# EAGLE board IN-12_panelA (EAGLE 9.6.2)
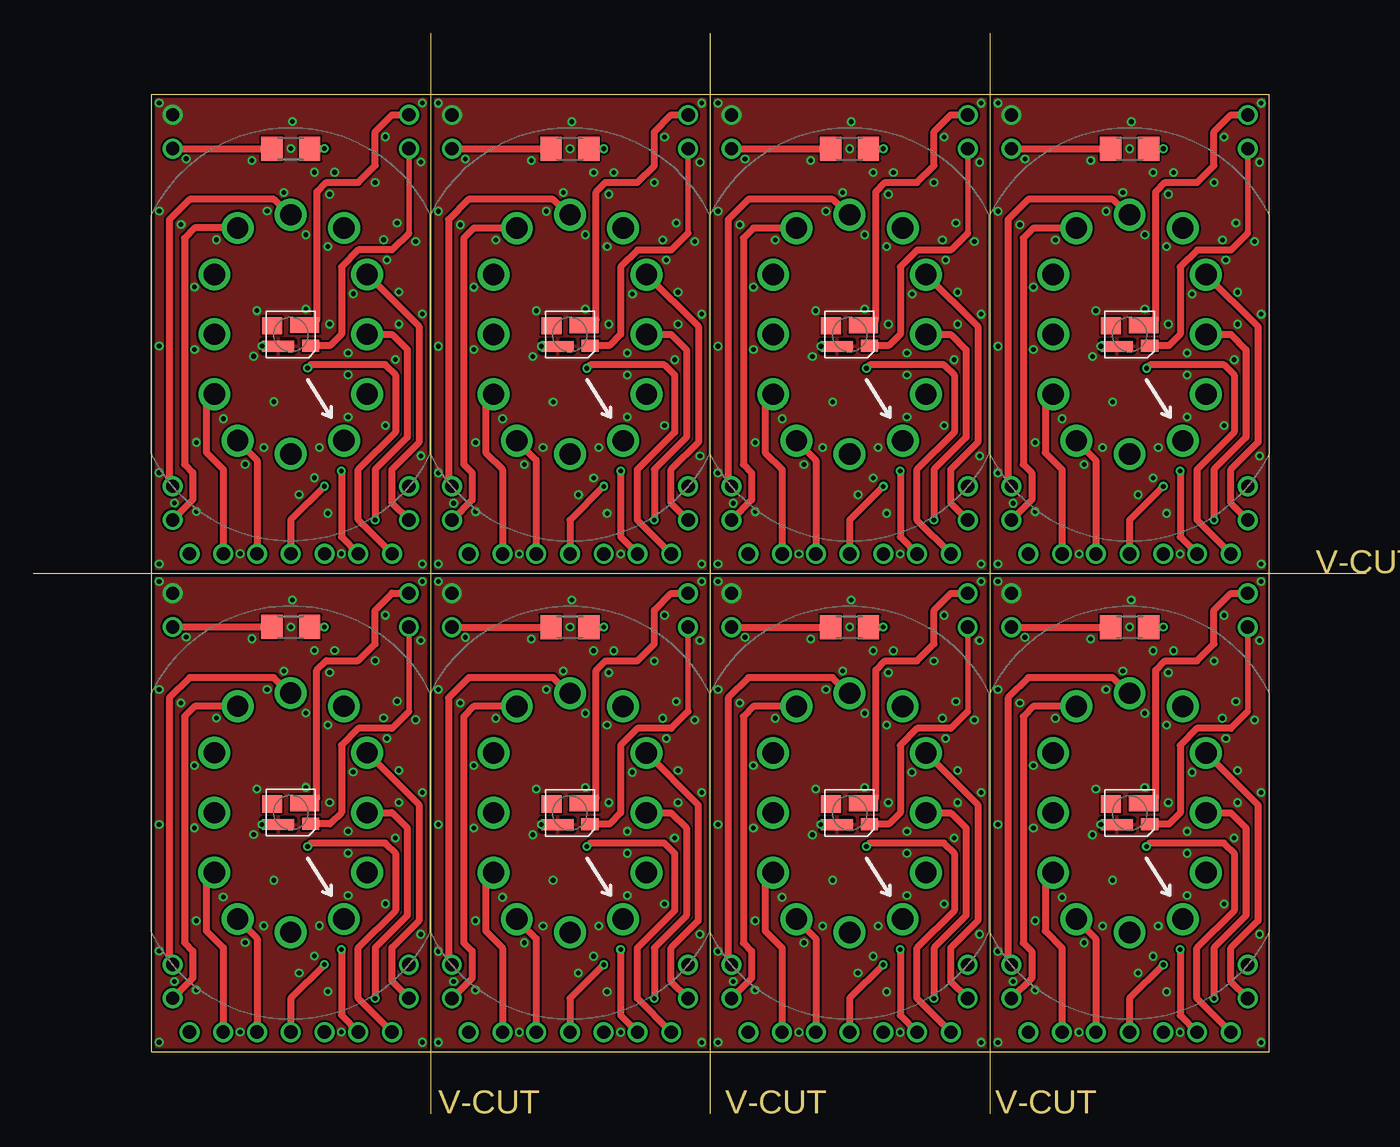
[diagram p0: board, top side]
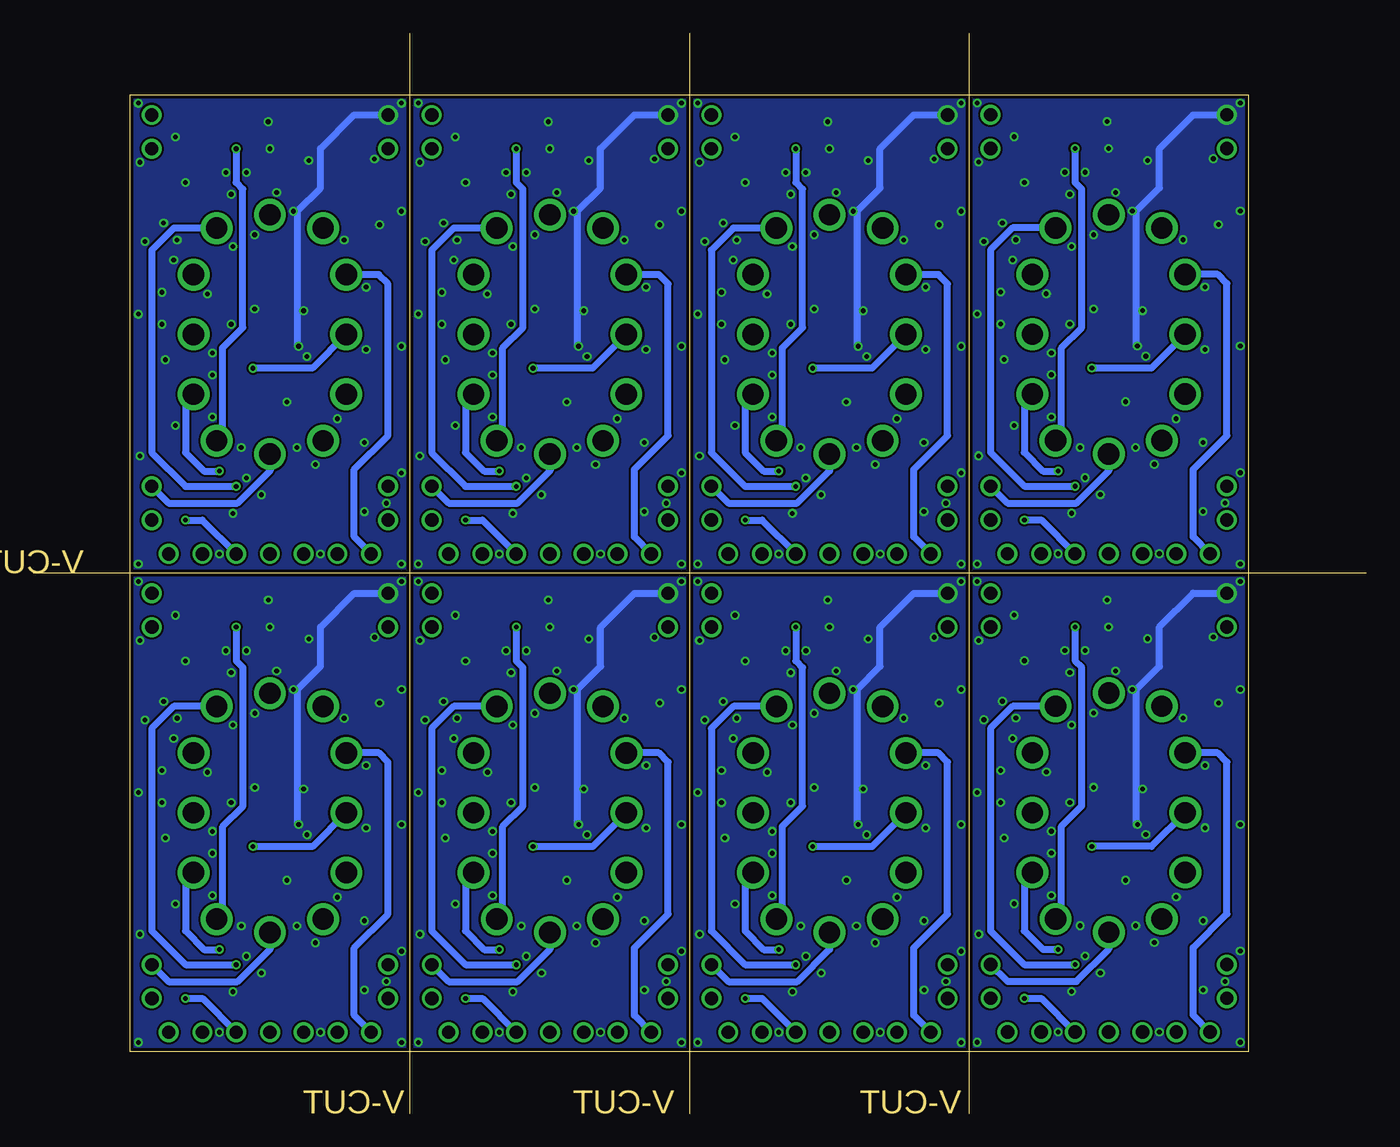
[diagram p1: board, bottom side, seen from below]

Size 100.33 x 81.28 mm. Coordinates in mm from the lower left corner, seen from the top.
Outline: 0,40.64 100.33,40.64
Outline: 29.89,81.28 29.89,0
Outline: 50.93,81.28 50.93,0
Outline: 71.99,81.28 71.99,0
Outline: 8.89,76.64 8.89,4.64 93.04,4.64 93.04,76.64 8.89,76.64
Copper layers (1*16): Top 0.035mm / dielectric 1.5mm / Bottom 0.035mm
Design rules "SeeedStudio_2layer_DRU_no_angle_20140221": minimum track width 6mil, minimum drill 12mil, track to track 6mil, track to pad 6mil, pad to pad 6mil, via to via 6mil, smd to smd 0mil, copper to edge 10mil, drill to drill 10mil, minimum pad ring 10mil, minimum via ring 6mil, stop-mask expansion 2mil, vias tented up to drill 100mil, thermal gap 10mil

## Footprints (pad centres in the part's own frame; a part is rotated, then mirrored left to right if it is on the bottom)
IN-12_PS = drill 1.6: 1 4,-8; 2 5.75,-4.5; 3 5.75,0; 4 5.75,4.5; 5 4,8; 6 0,9; 7 -4,8; 8 -5.75,4.5; 9 -5.75,0; 10 -5.75,-4.5; 11 -4,-8; 12 0,-9
SK68XXMINI = smd 1.3 x 0.9: P1 1.5,-0.85 | smd 2.2 x 1.2: P2 1.05,0.7 | smd 1.5 x 1.3: P3 -1.4,0.65 | smd 2.4 x 0.8: P4 -0.95,-0.9
R1206 = smd 1.6 x 1.803: 1 -1.422,0; 2 1.422,0

## Placement (x,y rotation side)
L1  IN-12B_PS  [IN-12_PS]  19.38,58.63 0 top
L2  IN-12B_PS  [IN-12_PS]  19.38,22.64 0 top
L3  IN-12B_PS  [IN-12_PS]  40.4,58.62 0 top
L4  IN-12B_PS  [IN-12_PS]  40.4,22.63 0 top
L5  IN-12B_PS  [IN-12_PS]  61.44,58.62 0 top
L6  IN-12B_PS  [IN-12_PS]  61.44,22.63 0 top
L7  IN-12B_PS  [IN-12_PS]  82.52,58.62 0 top
L8  IN-12B_PS  [IN-12_PS]  82.51,22.63 0 top
LED  SK6812MINI  [SK68XXMINI]  19.38,58.63 0 top
LED1  SK6812MINI  [SK68XXMINI]  19.38,22.64 0 top
LED2  SK6812MINI  [SK68XXMINI]  40.4,58.62 0 top
LED3  SK6812MINI  [SK68XXMINI]  40.4,22.63 0 top
LED4  SK6812MINI  [SK68XXMINI]  61.44,58.62 0 top
LED5  SK6812MINI  [SK68XXMINI]  61.44,22.63 0 top
LED6  SK6812MINI  [SK68XXMINI]  82.52,58.62 0 top
LED7  SK6812MINI  [SK68XXMINI]  82.51,22.63 0 top
R1  15k  [R1206]  19.38,36.61 180 top
R2  15k  [R1206]  19.38,72.6 180 top
R3  15k  [R1206]  40.4,72.59 180 top
R4  15k  [R1206]  40.4,36.6 180 top
R5  15k  [R1206]  61.44,72.59 180 top
R6  15k  [R1206]  61.44,36.6 180 top
R7  15k  [R1206]  82.52,72.59 180 top
R8  15k  [R1206]  82.51,36.6 180 top

## Library data of the parts
L1-L8 = nixie-tube
LED LED1-LED7 = leds
R1-R8 = rcl; SPICEPREFIX: R

## Nets
GND: LED.P4
GND1: LED1.P4
GND2: LED2.P4
GND3: LED3.P4
GND4: LED4.P4
GND5: LED5.P4
GND6: LED6.P4
GND7: LED7.P4
K0: L1.2
K1: L1.11
K2: L1.10
K3: L1.9
K4: L1.8
K5: L1.7
K6: L1.6
K7: L1.5
K8: L1.4
K9: L1.3
K10: L2.2
K11: L2.3
K12: L2.4
K13: L2.5
K14: L2.6
K15: L2.7
K16: L2.8
K17: L2.9
K18: L2.10
K19: L2.11
K20: L3.2
K21: L3.3
K22: L3.4
K23: L3.5
K24: L3.6
K25: L3.7
K26: L3.8
K27: L3.9
K28: L3.10
K29: L3.11
K30: L4.2
K31: L4.3
K32: L4.4
K33: L4.5
K34: L4.6
K35: L4.7
K36: L4.8
K37: L4.9
K38: L4.10
K39: L4.11
K40: L5.2
K41: L5.3
K42: L5.4
K43: L5.5
K44: L5.6
K45: L5.7
K46: L5.8
K47: L5.9
K48: L5.10
K49: L5.11
K50: L6.2
K51: L6.3
K52: L6.4
K53: L6.5
K54: L6.6
K55: L6.7
K56: L6.8
K57: L6.9
K58: L6.10
K59: L6.11
K60: L7.2
K61: L7.3
K62: L7.4
K63: L7.5
K64: L7.6
K65: L7.7
K66: L7.8
K67: L7.9
K68: L7.10
K69: L7.11
K70: L8.2
K71: L8.3
K72: L8.4
K73: L8.5
K74: L8.6
K75: L8.7
K76: L8.8
K77: L8.9
K78: L8.10
K79: L8.11
KD: L1.12
KD1: L2.12
KD2: L3.12
KD3: L4.12
KD4: L5.12
KD5: L6.12
KD6: L7.12
KD7: L8.12
LED: LED.P1
LED1: LED1.P1
LED2: LED2.P1
LED3: LED3.P1
LED4: LED4.P1
LED5: LED5.P1
LED6: LED6.P1
LED7: LED7.P1
N$1: L2.1 R1.1
N$2: L3.1 R3.1
N$3: L4.1 R4.1
N$4: L5.1 R5.1
N$5: L6.1 R6.1
N$6: L7.1 R7.1
N$7: L8.1 R8.1
N$11: L1.1 R2.1
VCC: LED.P2
VCC1: LED1.P2
VCC2: LED2.P2
VCC3: LED3.P2
VCC4: LED4.P2
VCC5: LED5.P2
VCC6: LED6.P2
VCC7: LED7.P2
VPP: R2.2
VPP1: R1.2
VPP2: R3.2
VPP3: R4.2
VPP4: R5.2
VPP5: R6.2
VPP6: R7.2
VPP7: R8.2

## Tracks (layer width: path | path; a pad name or v marks a point on that pad's centre or on a via)
GND  (via drill 0.35, 1)
  Top 0.508: LED.P4 17.24,57.73 v17.23,57.74
  Bottom 0.508: v17.23,57.74 17.29,57.8 17.29,67.93 15.57,69.64 15.57,72.6 13.04,75.14 v10.5,75.14
  other vias: 16.84,60.41 16.59,56.98 20.53,60.53 20.53,66.12 29.29,76.03 19.51,74.63 9.48,76.03 11.51,71.84 16.46,71.71 19.38,72.6 22.69,70.82 21.16,70.82 22.31,69.17 25.73,70.06 26.5,73.49 29.16,71.58 28.78,65.61 27.39,67.01 26.37,65.74 26.62,64.22 22.18,65.23 27.51,61.8 29.29,60.15 27.51,59.39 24.08,61.68 22.31,59.39 18.88,69.3 17.61,67.9 13.8,65.74 11.13,66.88 9.48,67.9 9.48,57.74 12.15,62.19 12.15,57.49 14.3,52.28 18.12,53.55 23.7,57.23 23.7,55.58 27.26,56.72 23.7,52.41 26.5,51.77 21.54,50.12 17.35,50.12 12.27,50.5 15.96,48.85 9.48,48.22 10.62,45.93 12.27,45.29 9.48,41.36 15.57,42.12 23.2,42.12 22.18,45.17 21.16,47.83 20.02,46.56 29.29,41.36 29.16,49.48
  pour Top: 8.97,76.54 29.8,76.54 29.8,40.72 8.97,40.72
  pour Bottom: 8.97,76.54 29.93,76.54 29.93,40.72 8.97,40.72
GND1  (via drill 0.35, 1)
  Top 0.508: LED1.P4 17.23,21.74 v17.22,21.75
  Bottom 0.508: v17.22,21.75 17.29,21.82 17.29,31.94 15.57,33.65 15.57,36.61 13.03,39.15 v10.49,39.15
  other vias: 16.84,24.42 16.59,20.99 20.53,24.54 20.53,30.13 29.29,40.04 19.51,38.64 9.48,40.04 11.51,35.85 16.46,35.72 19.38,36.61 22.69,34.83 21.16,34.83 22.3,33.18 25.73,34.07 26.5,37.5 29.16,35.59 28.78,29.62 27.38,31.02 26.37,29.75 26.62,28.23 22.18,29.24 27.51,25.81 29.29,24.16 27.51,23.4 24.08,25.69 22.3,23.4 18.88,33.31 17.61,31.91 13.8,29.75 11.13,30.89 9.48,31.91 9.48,21.75 12.14,26.2 12.14,21.5 14.3,16.29 18.11,17.56 23.7,21.24 23.7,19.59 27.26,20.73 23.7,16.42 26.5,15.78 21.54,14.13 17.35,14.13 12.27,14.51 15.95,12.86 9.48,12.23 10.62,9.94 12.27,9.3 9.48,5.37 15.57,6.13 23.19,6.13 22.18,9.18 21.16,11.84 20.02,10.57 29.29,5.37 29.16,13.5
  pour Top: 8.97,40.55 29.8,40.55 29.8,4.73 8.97,4.73
  pour Bottom: 8.97,40.55 29.92,40.55 29.92,4.73 8.97,4.73
GND2  (via drill 0.35, 1)
  Top 0.508: LED2.P4 38.25,57.72 v38.24,57.73
  Bottom 0.508: v38.24,57.73 38.31,57.8 38.31,67.92 36.59,69.63 36.59,72.59 34.05,75.13 v31.51,75.13
  other vias: 37.86,60.4 37.61,56.97 41.54,60.53 41.54,66.11 50.31,76.02 40.53,74.62 30.49,76.02 32.53,71.83 37.48,71.7 40.4,72.59 43.7,70.81 42.18,70.81 43.32,69.16 46.75,70.05 47.51,73.48 50.18,71.57 49.8,65.61 48.4,67 47.39,65.73 47.64,64.21 43.19,65.22 48.53,61.8 50.31,60.14 48.53,59.38 45.1,61.67 43.32,59.38 39.89,69.29 38.62,67.89 34.81,65.73 32.15,66.88 30.49,67.89 30.49,57.73 33.16,62.18 33.16,57.48 35.32,52.27 39.13,53.54 44.72,57.22 44.72,55.57 48.27,56.72 44.72,52.4 47.51,51.76 42.56,50.11 38.37,50.11 33.29,50.49 36.97,48.84 30.49,48.21 31.64,45.92 33.29,45.28 30.49,41.35 36.59,42.11 44.21,42.11 43.19,45.16 42.18,47.83 41.04,46.55 50.31,41.35 50.18,49.48
  pour Top: 29.99,76.53 50.81,76.53 50.81,40.71 29.99,40.71
  pour Bottom: 29.99,76.53 50.94,76.53 50.94,40.71 29.99,40.71
GND3  (via drill 0.35, 1)
  Top 0.508: LED3.P4 v38.25,21.73 v38.24,21.74
  Bottom 0.508: v38.24,21.74 38.3,21.81 38.3,31.93 36.59,33.64 36.59,36.6 34.05,39.14 v31.51,39.14
  other vias: 37.86,24.41 37.6,20.98 41.54,24.54 41.54,30.12 50.3,40.03 40.53,38.63 30.49,40.03 32.52,35.84 37.48,35.71 40.4,36.6 43.7,34.82 42.18,34.82 43.32,33.17 46.75,34.06 47.51,37.49 50.18,35.58 49.8,29.62 48.4,31.01 47.38,29.74 47.64,28.22 43.19,29.23 48.53,25.8 50.3,24.15 48.53,23.39 45.1,25.68 43.32,23.39 39.89,33.3 38.62,31.9 34.81,29.74 32.14,30.88 30.49,31.9 30.49,21.74 33.16,26.19 33.16,21.49 35.32,16.28 39.13,17.55 44.72,21.23 44.72,19.58 48.27,20.73 44.72,16.41 47.51,15.77 42.56,14.12 38.37,14.12 33.29,14.5 36.97,12.85 30.49,12.22 31.64,9.93 33.29,9.3 30.49,5.36 36.59,6.12 44.21,6.12 43.19,9.17 42.18,11.84 41.03,10.57 50.3,5.36 50.18,13.49
  pour Top: 29.98,40.54 50.81,40.54 50.81,4.72 29.98,4.72
  pour Bottom: 29.98,40.54 50.94,40.54 50.94,4.72 29.98,4.72
GND4  (via drill 0.35, 1)
  Top 0.508: LED4.P4 59.29,57.72 v59.28,57.73
  Bottom 0.508: v59.28,57.73 59.35,57.8 59.35,67.92 57.63,69.63 57.63,72.59 55.09,75.13 v52.55,75.13
  other vias: 58.9,60.4 58.65,56.97 62.59,60.53 62.59,66.11 71.35,76.02 61.57,74.62 51.54,76.02 53.57,71.83 58.52,71.7 61.44,72.59 64.74,70.81 63.22,70.81 64.36,69.16 67.79,70.05 68.55,73.48 71.22,71.57 70.84,65.61 69.44,67 68.43,65.73 68.68,64.21 64.24,65.22 69.57,61.8 71.35,60.14 69.57,59.38 66.14,61.67 64.36,59.38 60.93,69.29 59.66,67.89 55.85,65.73 53.19,66.88 51.54,67.89 51.54,57.73 54.2,62.18 54.2,57.48 56.36,52.27 60.17,53.54 65.76,57.22 65.76,55.57 69.32,56.72 65.76,52.4 68.55,51.76 63.6,50.11 59.41,50.11 54.33,50.49 58.01,48.84 51.54,48.21 52.68,45.92 54.33,45.28 51.54,41.35 57.63,42.11 65.25,42.11 64.24,45.16 63.22,47.83 62.08,46.55 71.35,41.35 71.22,49.48
  pour Top: 51.03,76.53 71.86,76.53 71.86,40.71 51.03,40.71
  pour Bottom: 51.03,76.53 71.98,76.53 71.98,40.71 51.03,40.71
GND5  (via drill 0.35, 1)
  Top 0.508: LED5.P4 59.29,21.73 v59.28,21.74
  Bottom 0.508: v59.28,21.74 59.35,21.81 59.35,31.93 57.63,33.64 57.63,36.6 55.09,39.14 v52.55,39.14
  other vias: 58.9,24.41 58.65,20.98 62.58,24.54 62.58,30.12 71.35,40.03 61.57,38.63 51.53,40.03 53.57,35.84 58.52,35.71 61.44,36.6 64.74,34.82 63.22,34.82 64.36,33.17 67.79,34.06 68.55,37.49 71.22,35.58 70.84,29.62 69.44,31.01 68.43,29.74 68.68,28.22 64.23,29.23 69.57,25.8 71.35,24.15 69.57,23.39 66.14,25.68 64.36,23.39 60.93,33.3 59.66,31.9 55.85,29.74 53.19,30.88 51.53,31.9 51.53,21.74 54.2,26.19 54.2,21.49 56.36,16.28 60.17,17.55 65.76,21.23 65.76,19.58 69.31,20.73 65.76,16.41 68.55,15.77 63.6,14.12 59.41,14.12 54.33,14.5 58.01,12.85 51.53,12.22 52.68,9.93 54.33,9.3 51.53,5.36 57.63,6.12 65.25,6.12 64.23,9.17 63.22,11.84 62.08,10.57 71.35,5.36 71.22,13.49
  pour Top: 51.03,40.54 71.85,40.54 71.85,4.72 51.03,4.72
  pour Bottom: 51.03,40.54 71.98,40.54 71.98,4.72 51.03,4.72
GND6  (via drill 0.35, 1)
  Top 0.508: LED6.P4 v80.37,57.72 v80.36,57.73
  Bottom 0.508: v80.36,57.73 80.42,57.8 80.42,67.92 78.71,69.63 78.71,72.59 76.17,75.13 v73.63,75.13
  other vias: 79.98,60.4 79.72,56.97 83.66,60.53 83.66,66.11 92.42,76.02 82.64,74.62 72.61,76.02 74.64,71.83 79.59,71.7 82.52,72.59 85.82,70.81 84.29,70.81 85.44,69.16 88.87,70.05 89.63,73.48 92.3,71.57 91.91,65.61 90.52,67 89.5,65.73 89.75,64.21 85.31,65.22 90.64,61.8 92.42,60.14 90.64,59.38 87.22,61.67 85.44,59.38 82.01,69.29 80.74,67.89 76.93,65.73 74.26,66.88 72.61,67.89 72.61,57.73 75.28,62.18 75.28,57.48 77.44,52.27 81.25,53.54 86.83,57.22 86.83,55.57 90.39,56.72 86.83,52.4 89.63,51.76 84.67,50.11 80.48,50.11 75.4,50.49 79.09,48.84 72.61,48.21 73.75,45.92 75.4,45.28 72.61,41.35 78.71,42.11 86.33,42.11 85.31,45.16 84.29,47.83 83.15,46.55 92.42,41.35 92.3,49.48
  pour Top: 72.1,76.53 92.93,76.53 92.93,40.71 72.1,40.71
  pour Bottom: 72.1,76.53 93.06,76.53 93.06,40.71 72.1,40.71
GND7  (via drill 0.35, 1)
  Top 0.508: LED7.P4 v80.37,21.73 v80.36,21.74
  Bottom 0.508: v80.36,21.74 80.42,21.81 80.42,31.93 78.7,33.64 78.7,36.6 76.16,39.14 v73.62,39.14
  other vias: 79.97,24.41 79.72,20.98 83.66,24.54 83.66,30.12 92.42,40.03 82.64,38.63 72.61,40.03 74.64,35.84 79.59,35.71 82.51,36.6 85.82,34.82 84.29,34.82 85.44,33.17 88.86,34.06 89.63,37.49 92.29,35.58 91.91,29.62 90.52,31.01 89.5,29.74 89.75,28.22 85.31,29.23 90.64,25.8 92.42,24.15 90.64,23.39 87.21,25.68 85.44,23.39 82.01,33.3 80.74,31.9 76.93,29.74 74.26,30.88 72.61,31.9 72.61,21.74 75.28,26.19 75.28,21.49 77.43,16.28 81.24,17.55 86.83,21.23 86.83,19.58 90.39,20.73 86.83,16.41 89.63,15.77 84.67,14.12 80.48,14.12 75.4,14.5 79.08,12.85 72.61,12.22 73.75,9.93 75.4,9.3 72.61,5.36 78.7,6.12 86.32,6.12 85.31,9.17 84.29,11.84 83.15,10.57 92.42,5.36 92.29,13.49
  pour Top: 72.1,40.54 92.93,40.54 92.93,4.72 72.1,4.72
  pour Bottom: 72.1,40.54 93.06,40.54 93.06,4.72 72.1,4.72
K0  (via drill 0.35, 1)
  Top 0.508: v23.2,48.34 23.2,43.39 v24.46,42.12
  Bottom 0.508: L1.2 25.73,53.53 25.73,49.74 24.34,48.34 v23.2,48.34
K1  (via drill 1)
  Top 0.508: L1.11 16.84,49.17 v16.84,42.12
K2  (via drill 1)
  Top 0.508: L1.10 13.05,53.55 13.04,53.55 13.04,49.74 14.3,48.47 v14.3,42.12
K3  (via drill 0.35, 1)
  Top 0.508: v20.66,56.09 20.91,56.34 26.5,56.34 27.26,55.58 27.26,51.26 24.46,48.47 24.46,44.66 v27,42.12
  Bottom 0.508: L1.9 16.18,56.09 v20.66,56.09
K4  (via drill 1)
  Bottom 0.508: v11.77,42.12 13.04,43.39 13.04,48.47 10.5,51.01 10.5,62.44 11.19,63.13 L1.8
K5  (via drill 1)
  Top 0.508: L1.7 12.14,66.63 11.38,65.87 11.38,48.85 12.02,48.22 12.02,46.18 v10.5,44.66
K6  (via drill 1)
  Top 0.508: L1.6 19.27,67.63 18.12,68.79 11.77,68.79 10.24,67.27 10.24,47.45 v10.5,47.2
K7  (via drill 0.35, 1)
  Top 0.508: v21.93,47.2 19.38,44.66 v19.38,42.12
  Bottom 0.508: L1.5 26.62,66.63 28.28,64.98 28.28,49.74 25.73,47.2 v21.93,47.2
K8  (via drill 1)
  Top 0.508: L1.4 29.04,59.23 29.04,50.5 27,48.47 27,45.93 v28.28,44.66
K9  (via drill 0.35, 1)
  Top 0.508: L1.3 27,58.63 28.15,57.49 28.15,50.88 25.73,48.47 v25.73,44.66
  Bottom 0.508: v25.73,44.66 24.46,44.66 v21.93,42.12
K10  (via drill 0.35, 1)
  Top 0.508: v23.19,12.35 23.19,7.4 v24.46,6.13
  Bottom 0.508: L2.2 25.73,17.54 25.73,13.75 24.34,12.35 v23.19,12.35
K11  (via drill 0.35, 1)
  Top 0.508: L2.3 27,22.64 28.15,21.5 28.15,14.89 25.73,12.48 v25.73,8.67
  Bottom 0.508: v25.73,8.67 24.46,8.67 v21.92,6.13
K12  (via drill 1)
  Top 0.508: L2.4 29.04,23.24 29.04,14.51 27,12.48 27,9.94 v28.27,8.67
K13  (via drill 0.35, 1)
  Top 0.508: v21.92,11.21 19.38,8.67 v19.38,6.13
  Bottom 0.508: L2.5 26.62,30.64 28.27,28.99 28.27,13.75 25.73,11.21 v21.92,11.21
K14  (via drill 1)
  Top 0.508: L2.6 19.27,31.64 18.11,32.8 11.76,32.8 10.24,31.27 10.24,11.46 v10.49,11.21
K15  (via drill 1)
  Top 0.508: L2.7 12.14,30.64 11.38,29.88 11.38,12.86 12.02,12.23 12.02,10.19 v10.49,8.67
K16  (via drill 1)
  Bottom 0.508: v11.76,6.13 13.03,7.4 13.03,12.48 10.49,15.02 10.49,26.45 11.18,27.14 L2.8
K17  (via drill 0.35, 1)
  Top 0.508: v20.65,20.1 20.91,20.35 26.5,20.35 27.26,19.59 27.26,15.27 24.46,12.48 24.46,8.67 v27,6.13
  Bottom 0.508: L2.9 16.17,20.1 v20.65,20.1
K18  (via drill 1)
  Top 0.508: L2.10 13.05,17.56 13.03,17.56 13.03,13.75 14.3,12.48 v14.3,6.13
K19  (via drill 1)
  Top 0.508: L2.11 16.84,13.18 v16.84,6.13
K20  (via drill 0.35, 1)
  Top 0.508: v44.21,48.33 44.21,43.38 v45.48,42.11
  Bottom 0.508: L3.2 46.75,53.52 46.75,49.73 45.35,48.33 v44.21,48.33
K21  (via drill 0.35, 1)
  Top 0.508: L3.3 48.02,58.62 49.16,57.48 49.16,50.87 46.75,48.46 v46.75,44.65
  Bottom 0.508: v46.75,44.65 45.48,44.65 v42.94,42.11
K22  (via drill 1)
  Top 0.508: L3.4 50.05,59.22 50.05,50.49 48.02,48.46 48.02,45.92 v49.29,44.65
K23  (via drill 0.35, 1)
  Top 0.508: v42.94,47.19 40.4,44.65 v40.4,42.11
  Bottom 0.508: L3.5 47.64,66.62 49.29,64.97 49.29,49.73 46.75,47.19 v42.94,47.19
K24  (via drill 1)
  Top 0.508: L3.6 40.29,67.62 39.13,68.78 32.78,68.78 31.26,67.26 31.26,47.44 v31.51,47.19
K25  (via drill 1)
  Top 0.508: L3.7 33.16,66.62 32.4,65.86 32.4,48.84 33.03,48.21 33.03,46.17 v31.51,44.65
K26  (via drill 1)
  Bottom 0.508: v32.78,42.11 34.05,43.38 34.05,48.46 31.51,51 31.51,62.43 32.2,63.12 L3.8
K27  (via drill 0.35, 1)
  Top 0.508: v41.67,56.08 41.92,56.33 47.51,56.33 48.27,55.57 48.27,51.25 45.48,48.46 45.48,44.65 v48.02,42.11
  Bottom 0.508: L3.9 37.19,56.08 v41.67,56.08
K28  (via drill 1)
  Top 0.508: L3.10 34.07,53.54 34.05,53.54 34.05,49.73 35.32,48.46 v35.32,42.11
K29  (via drill 1)
  Top 0.508: L3.11 37.86,49.16 v37.86,42.11
K30  (via drill 0.35, 1)
  Top 0.508: v44.21,12.34 44.21,7.39 v45.48,6.12
  Bottom 0.508: L4.2 46.75,17.53 46.75,13.74 45.35,12.34 v44.21,12.34
K31  (via drill 0.35, 1)
  Top 0.508: L4.3 48.02,22.63 49.16,21.49 49.16,14.88 46.75,12.47 v46.75,8.66
  Bottom 0.508: v46.75,8.66 45.48,8.66 v42.94,6.12
K32  (via drill 1)
  Top 0.508: L4.4 50.05,23.23 50.05,14.5 48.02,12.47 48.02,9.93 v49.29,8.66
K33  (via drill 0.35, 1)
  Top 0.508: v42.94,11.2 40.4,8.66 v40.4,6.12
  Bottom 0.508: L4.5 47.64,30.63 49.29,28.98 49.29,13.74 46.75,11.2 v42.94,11.2
K34  (via drill 1)
  Top 0.508: L4.6 40.29,31.63 39.13,32.79 32.78,32.79 31.25,31.27 31.25,11.45 v31.51,11.2
K35  (via drill 1)
  Top 0.508: L4.7 33.16,30.63 32.4,29.87 32.4,12.85 33.03,12.22 33.03,10.18 v31.51,8.66
K36  (via drill 1)
  Bottom 0.508: v32.78,6.12 34.05,7.39 34.05,12.47 31.51,15.01 31.51,26.44 32.2,27.13 L4.8
K37  (via drill 0.35, 1)
  Top 0.508: v41.67,20.09 41.92,20.34 47.51,20.34 48.27,19.58 48.27,15.26 45.48,12.47 45.48,8.66 v48.02,6.12
  Bottom 0.508: L4.9 37.19,20.09 v41.67,20.09
K38  (via drill 1)
  Top 0.508: L4.10 34.07,17.55 34.05,17.55 34.05,13.74 35.32,12.47 v35.32,6.12
K39  (via drill 1)
  Top 0.508: L4.11 37.86,13.17 v37.86,6.12
K40  (via drill 0.35, 1)
  Top 0.508: v65.25,48.33 65.25,43.38 v66.52,42.11
  Bottom 0.508: L5.2 67.79,53.52 67.79,49.73 66.4,48.33 v65.25,48.33
K41  (via drill 0.35, 1)
  Top 0.508: L5.3 69.06,58.62 70.21,57.48 70.21,50.87 67.79,48.46 v67.79,44.65
  Bottom 0.508: v67.79,44.65 66.52,44.65 v63.98,42.11
K42  (via drill 1)
  Top 0.508: L5.4 71.09,59.22 71.09,50.49 69.06,48.46 69.06,45.92 v70.33,44.65
K43  (via drill 0.35, 1)
  Top 0.508: v63.98,47.19 61.44,44.65 v61.44,42.11
  Bottom 0.508: L5.5 68.68,66.62 70.33,64.97 70.33,49.73 67.79,47.19 v63.98,47.19
K44  (via drill 1)
  Top 0.508: L5.6 61.33,67.62 60.17,68.78 53.82,68.78 52.3,67.26 52.3,47.44 v52.55,47.19
K45  (via drill 1)
  Top 0.508: L5.7 54.2,66.62 53.44,65.86 53.44,48.84 54.08,48.21 54.08,46.17 v52.55,44.65
K46  (via drill 1)
  Bottom 0.508: v53.82,42.11 55.09,43.38 55.09,48.46 52.55,51 52.55,62.43 53.24,63.12 L5.8
K47  (via drill 0.35, 1)
  Top 0.508: v62.71,56.08 62.97,56.33 68.55,56.33 69.32,55.57 69.32,51.25 66.52,48.46 66.52,44.65 v69.06,42.11
  Bottom 0.508: L5.9 58.23,56.08 v62.71,56.08
K48  (via drill 1)
  Top 0.508: L5.10 55.11,53.54 55.09,53.54 55.09,49.73 56.36,48.46 v56.36,42.11
K49  (via drill 1)
  Top 0.508: L5.11 58.9,49.16 v58.9,42.11
K50  (via drill 0.35, 1)
  Top 0.508: v65.25,12.34 65.25,7.39 v66.52,6.12
  Bottom 0.508: L6.2 67.79,17.53 67.79,13.74 66.39,12.34 v65.25,12.34
K51  (via drill 0.35, 1)
  Top 0.508: L6.3 69.06,22.63 70.2,21.49 70.2,14.88 67.79,12.47 v67.79,8.66
  Bottom 0.508: v67.79,8.66 66.52,8.66 v63.98,6.12
K52  (via drill 1)
  Top 0.508: L6.4 71.09,23.23 71.09,14.5 69.06,12.47 69.06,9.93 v70.33,8.66
K53  (via drill 0.35, 1)
  Top 0.508: v63.98,11.2 61.44,8.66 v61.44,6.12
  Bottom 0.508: L6.5 68.68,30.63 70.33,28.98 70.33,13.74 67.79,11.2 v63.98,11.2
K54  (via drill 1)
  Top 0.508: L6.6 61.33,31.63 60.17,32.79 53.82,32.79 52.3,31.27 52.3,11.45 v52.55,11.2
K55  (via drill 1)
  Top 0.508: L6.7 54.2,30.63 53.44,29.87 53.44,12.85 54.07,12.22 54.07,10.18 v52.55,8.66
K56  (via drill 1)
  Bottom 0.508: v53.82,6.12 55.09,7.39 55.09,12.47 52.55,15.01 52.55,26.44 53.24,27.13 L6.8
K57  (via drill 0.35, 1)
  Top 0.508: v62.71,20.09 62.97,20.34 68.55,20.34 69.31,19.58 69.31,15.26 66.52,12.47 66.52,8.66 v69.06,6.12
  Bottom 0.508: L6.9 58.23,20.09 v62.71,20.09
K58  (via drill 1)
  Top 0.508: L6.10 55.11,17.55 55.09,17.55 55.09,13.74 56.36,12.47 v56.36,6.12
K59  (via drill 1)
  Top 0.508: L6.11 58.9,13.17 v58.9,6.12
K60  (via drill 0.35, 1)
  Top 0.508: v86.33,48.33 86.33,43.38 v87.6,42.11
  Bottom 0.508: L7.2 88.87,53.52 88.87,49.73 87.47,48.33 v86.33,48.33
K61  (via drill 0.35, 1)
  Top 0.508: L7.3 90.14,58.62 91.28,57.48 91.28,50.87 88.87,48.46 v88.87,44.65
  Bottom 0.508: v88.87,44.65 87.6,44.65 v85.06,42.11
K62  (via drill 1)
  Top 0.508: L7.4 92.17,59.22 92.17,50.49 90.14,48.46 90.14,45.92 v91.41,44.65
K63  (via drill 0.35, 1)
  Top 0.508: v85.06,47.19 82.52,44.65 v82.52,42.11
  Bottom 0.508: L7.5 89.76,66.62 91.41,64.97 91.41,49.73 88.87,47.19 v85.06,47.19
K64  (via drill 1)
  Top 0.508: L7.6 82.41,67.62 81.25,68.78 74.9,68.78 73.37,67.26 73.37,47.44 v73.63,47.19
K65  (via drill 1)
  Top 0.508: L7.7 75.28,66.62 74.52,65.86 74.52,48.84 75.15,48.21 75.15,46.17 v73.63,44.65
K66  (via drill 1)
  Bottom 0.508: v74.9,42.11 76.17,43.38 76.17,48.46 73.63,51 73.63,62.43 74.32,63.12 L7.8
K67  (via drill 0.35, 1)
  Top 0.508: v83.79,56.08 84.04,56.33 89.63,56.33 90.39,55.57 90.39,51.25 87.6,48.46 87.6,44.65 v90.14,42.11
  Bottom 0.508: L7.9 79.31,56.08 v83.79,56.08
K68  (via drill 1)
  Top 0.508: L7.10 76.19,53.54 76.17,53.54 76.17,49.73 77.44,48.46 v77.44,42.11
K69  (via drill 1)
  Top 0.508: L7.11 79.98,49.16 v79.98,42.11
K70  (via drill 0.35, 1)
  Top 0.508: v86.32,12.34 86.32,7.39 v87.59,6.12
  Bottom 0.508: L8.2 88.86,17.53 88.86,13.74 87.47,12.34 v86.32,12.34
K71  (via drill 0.35, 1)
  Top 0.508: L8.3 90.13,22.63 91.28,21.49 91.28,14.88 88.86,12.47 v88.86,8.66
  Bottom 0.508: v88.86,8.66 87.59,8.66 v85.05,6.12
K72  (via drill 1)
  Top 0.508: L8.4 92.17,23.23 92.17,14.5 90.13,12.47 90.13,9.93 v91.4,8.66
K73  (via drill 0.35, 1)
  Top 0.508: v85.05,11.2 82.51,8.66 v82.51,6.12
  Bottom 0.508: L8.5 89.75,30.63 91.4,28.98 91.4,13.74 88.86,11.2 v85.05,11.2
K74  (via drill 1)
  Top 0.508: L8.6 82.4,31.63 81.24,32.79 74.89,32.79 73.37,31.27 73.37,11.45 v73.62,11.2
K75  (via drill 1)
  Top 0.508: L8.7 75.27,30.63 74.51,29.87 74.51,12.85 75.15,12.22 75.15,10.18 v73.62,8.66
K76  (via drill 1)
  Bottom 0.508: v74.89,6.12 76.16,7.39 76.16,12.47 73.62,15.01 73.62,26.44 74.31,27.13 L8.8
K77  (via drill 0.35, 1)
  Top 0.508: v83.78,20.09 84.04,20.34 89.63,20.34 90.39,19.58 90.39,15.26 87.59,12.47 87.59,8.66 v90.13,6.12
  Bottom 0.508: L8.9 79.3,20.09 v83.78,20.09
K78  (via drill 1)
  Top 0.508: L8.10 76.18,17.55 76.16,17.55 76.16,13.74 77.43,12.47 v77.43,6.12
K79  (via drill 1)
  Top 0.508: L8.11 79.97,13.17 v79.97,6.12
KD  (via drill 1)
  Bottom 0.508: L1.12 19.38,48.36 21.82,45.93 27,45.93 v28.28,47.2
KD1  (via drill 1)
  Bottom 0.508: L2.12 19.38,12.37 21.81,9.94 27,9.94 v28.27,11.21
KD2  (via drill 1)
  Bottom 0.508: L3.12 40.4,48.35 42.83,45.92 48.02,45.92 v49.29,47.19
KD3  (via drill 1)
  Bottom 0.508: L4.12 40.4,12.36 42.83,9.93 48.02,9.93 v49.29,11.2
KD4  (via drill 1)
  Bottom 0.508: L5.12 61.44,48.35 63.87,45.92 69.06,45.92 v70.33,47.19
KD5  (via drill 1)
  Bottom 0.508: L6.12 61.44,12.36 63.87,9.93 69.06,9.93 v70.33,11.2
KD6  (via drill 1)
  Bottom 0.508: L7.12 82.52,48.35 84.95,45.92 90.14,45.92 v91.41,47.19
KD7  (via drill 1)
  Bottom 0.508: L8.12 82.51,12.36 84.94,9.93 90.13,9.93 v91.4,11.2
LED  (via drill 1)
  Top 0.406: v28.28,72.6 28.28,66.25
  Top 0.508: 28.28,66.25 27,64.98 24.46,64.98 23.2,63.71 23.2,58.63 22.34,57.78 LED.P1
LED1  (via drill 1)
  Top 0.406: v28.27,36.61 28.27,30.26
  Top 0.508: 28.27,30.26 27,28.99 24.46,28.99 23.19,27.72 23.19,22.64 22.34,21.79 LED1.P1
LED2  (via drill 1)
  Top 0.406: v49.29,72.59 49.29,66.24
  Top 0.508: 49.29,66.24 48.02,64.97 45.48,64.97 44.21,63.7 44.21,58.62 43.36,57.77 LED2.P1
LED3  (via drill 1)
  Top 0.406: v49.29,36.6 49.29,30.25
  Top 0.508: 49.29,30.25 48.02,28.98 45.48,28.98 44.21,27.71 44.21,22.63 43.36,21.78 LED3.P1
LED4  (via drill 1)
  Top 0.406: v70.33,72.59 70.33,66.24
  Top 0.508: 70.33,66.24 69.06,64.97 66.52,64.97 65.25,63.7 65.25,58.62 64.4,57.77 LED4.P1
LED5  (via drill 1)
  Top 0.406: v70.33,36.6 70.33,30.25
  Top 0.508: 70.33,30.25 69.06,28.98 66.52,28.98 65.25,27.71 65.25,22.63 64.4,21.78 LED5.P1
LED6  (via drill 1)
  Top 0.406: v91.41,72.59 91.41,66.24
  Top 0.508: 91.41,66.24 90.14,64.97 87.6,64.97 86.33,63.7 86.33,58.62 85.48,57.77 LED6.P1
LED7  (via drill 1)
  Top 0.406: v91.4,36.6 91.4,30.25
  Top 0.508: 91.4,30.25 90.13,28.98 87.59,28.98 86.32,27.71 86.32,22.63 85.47,21.78 LED7.P1
N$1  (via drill 0.35)
  Top 0.508: R1.1 v21.92,36.61
  Bottom 0.508: L2.1 22.94,15.08 22.94,21.62 21.41,23.15 21.41,33.56 21.92,34.07 v21.92,36.61
N$2  (via drill 0.35)
  Top 0.508: R3.1 v42.94,72.59
  Bottom 0.508: L3.1 43.96,51.06 43.96,57.6 42.43,59.13 42.43,69.54 42.94,70.05 v42.94,72.59
N$3  (via drill 0.35)
  Top 0.508: R4.1 v42.94,36.6
  Bottom 0.508: L4.1 43.95,15.07 43.95,21.61 42.43,23.14 42.43,33.55 42.94,34.06 v42.94,36.6
N$4  (via drill 0.35)
  Top 0.508: R5.1 v63.98,72.59
  Bottom 0.508: L5.1 65,51.06 65,57.6 63.47,59.13 63.47,69.54 63.98,70.05 v63.98,72.59
N$5  (via drill 0.35)
  Top 0.508: R6.1 v63.98,36.6
  Bottom 0.508: L6.1 65,15.07 65,21.61 63.47,23.14 63.47,33.55 63.98,34.06 v63.98,36.6
N$6  (via drill 0.35)
  Top 0.508: R7.1 v85.06,72.59
  Bottom 0.508: L7.1 86.07,51.06 86.07,57.6 84.55,59.13 84.55,69.54 85.06,70.05 v85.06,72.59
N$7  (via drill 0.35)
  Top 0.508: R8.1 v85.05,36.6
  Bottom 0.508: L8.1 86.07,15.07 86.07,21.61 84.55,23.14 84.55,33.55 85.05,34.06 v85.05,36.6
N$11  (via drill 0.35)
  Top 0.508: R2.1 v21.93,72.6
  Bottom 0.508: L1.1 22.94,51.07 22.94,57.61 21.42,59.14 21.42,69.55 21.93,70.06 v21.93,72.6
VCC  (via drill 1)
  Top 0.508: v28.28,75.14 27,75.14 25.73,73.87 25.73,71.33 24.46,70.06 22.05,70.06 21.35,69.36 21.35,59.74 20.94,59.33 LED.P2
VCC1  (via drill 1)
  Top 0.508: v28.27,39.15 27,39.15 25.73,37.88 25.73,35.34 24.46,34.07 22.05,34.07 21.35,33.37 21.35,23.75 20.94,23.34 LED1.P2
VCC2  (via drill 1)
  Top 0.508: v49.29,75.13 48.02,75.13 46.75,73.86 46.75,71.32 45.48,70.05 43.06,70.05 42.37,69.35 42.37,59.73 41.96,59.32 LED2.P2
VCC3  (via drill 1)
  Top 0.508: v49.29,39.14 48.02,39.14 46.75,37.87 46.75,35.33 45.48,34.06 43.06,34.06 42.37,33.36 42.37,23.74 41.96,23.33 LED3.P2
VCC4  (via drill 1)
  Top 0.508: v70.33,75.13 69.06,75.13 67.79,73.86 67.79,71.32 66.52,70.05 64.11,70.05 63.41,69.35 63.41,59.73 63,59.32 LED4.P2
VCC5  (via drill 1)
  Top 0.508: v70.33,39.14 69.06,39.14 67.79,37.87 67.79,35.33 66.52,34.06 64.1,34.06 63.41,33.36 63.41,23.74 63,23.33 LED5.P2
VCC6  (via drill 1)
  Top 0.508: v91.41,75.13 90.14,75.13 88.87,73.86 88.87,71.32 87.6,70.05 85.18,70.05 84.48,69.35 84.48,59.73 84.07,59.32 LED6.P2
VCC7  (via drill 1)
  Top 0.508: v91.4,39.14 90.13,39.14 88.86,37.87 88.86,35.33 87.59,34.06 85.18,34.06 84.48,33.36 84.48,23.74 84.07,23.33 LED7.P2
VPP  (via drill 1)
  Top 0.508: v10.5,72.6 R2.2
VPP1  (via drill 1)
  Top 0.508: v10.49,36.61 R1.2
VPP2  (via drill 1)
  Top 0.508: v31.51,72.59 R3.2
VPP3  (via drill 1)
  Top 0.508: v31.51,36.6 R4.2
VPP4  (via drill 1)
  Top 0.508: v52.55,72.59 R5.2
VPP5  (via drill 1)
  Top 0.508: v52.55,36.6 R6.2
VPP6  (via drill 1)
  Top 0.508: v73.63,72.59 R7.2
VPP7  (via drill 1)
  Top 0.508: v73.62,36.6 R8.2

## Text on the board
Dimension: V-CUT | V-CUT | V-CUT | V-CUT
tStop: Designed by @fujiy0, 2020 | Designed by @fujiy0, 2020 | Designed by @fujiy0, 2020 | Designed by @fujiy0, 2020 | Designed by @fujiy0, 2020 | Designed by @fujiy0, 2020 | Designed by @fujiy0, 2020 | Designed by @fujiy0, 2020
_tNames: R2 | LED